# Altium PCB PCB4.PcbDoc
Units mm, origin at the board's own origin, x right, y up, seen from the top; angles counter-clockwise.
Board outline 76.2 x 101.6 mm, 2 copper layers (Top Layer, Bottom Layer); 13 components, 17 nets, 64 pads, 4 vias.
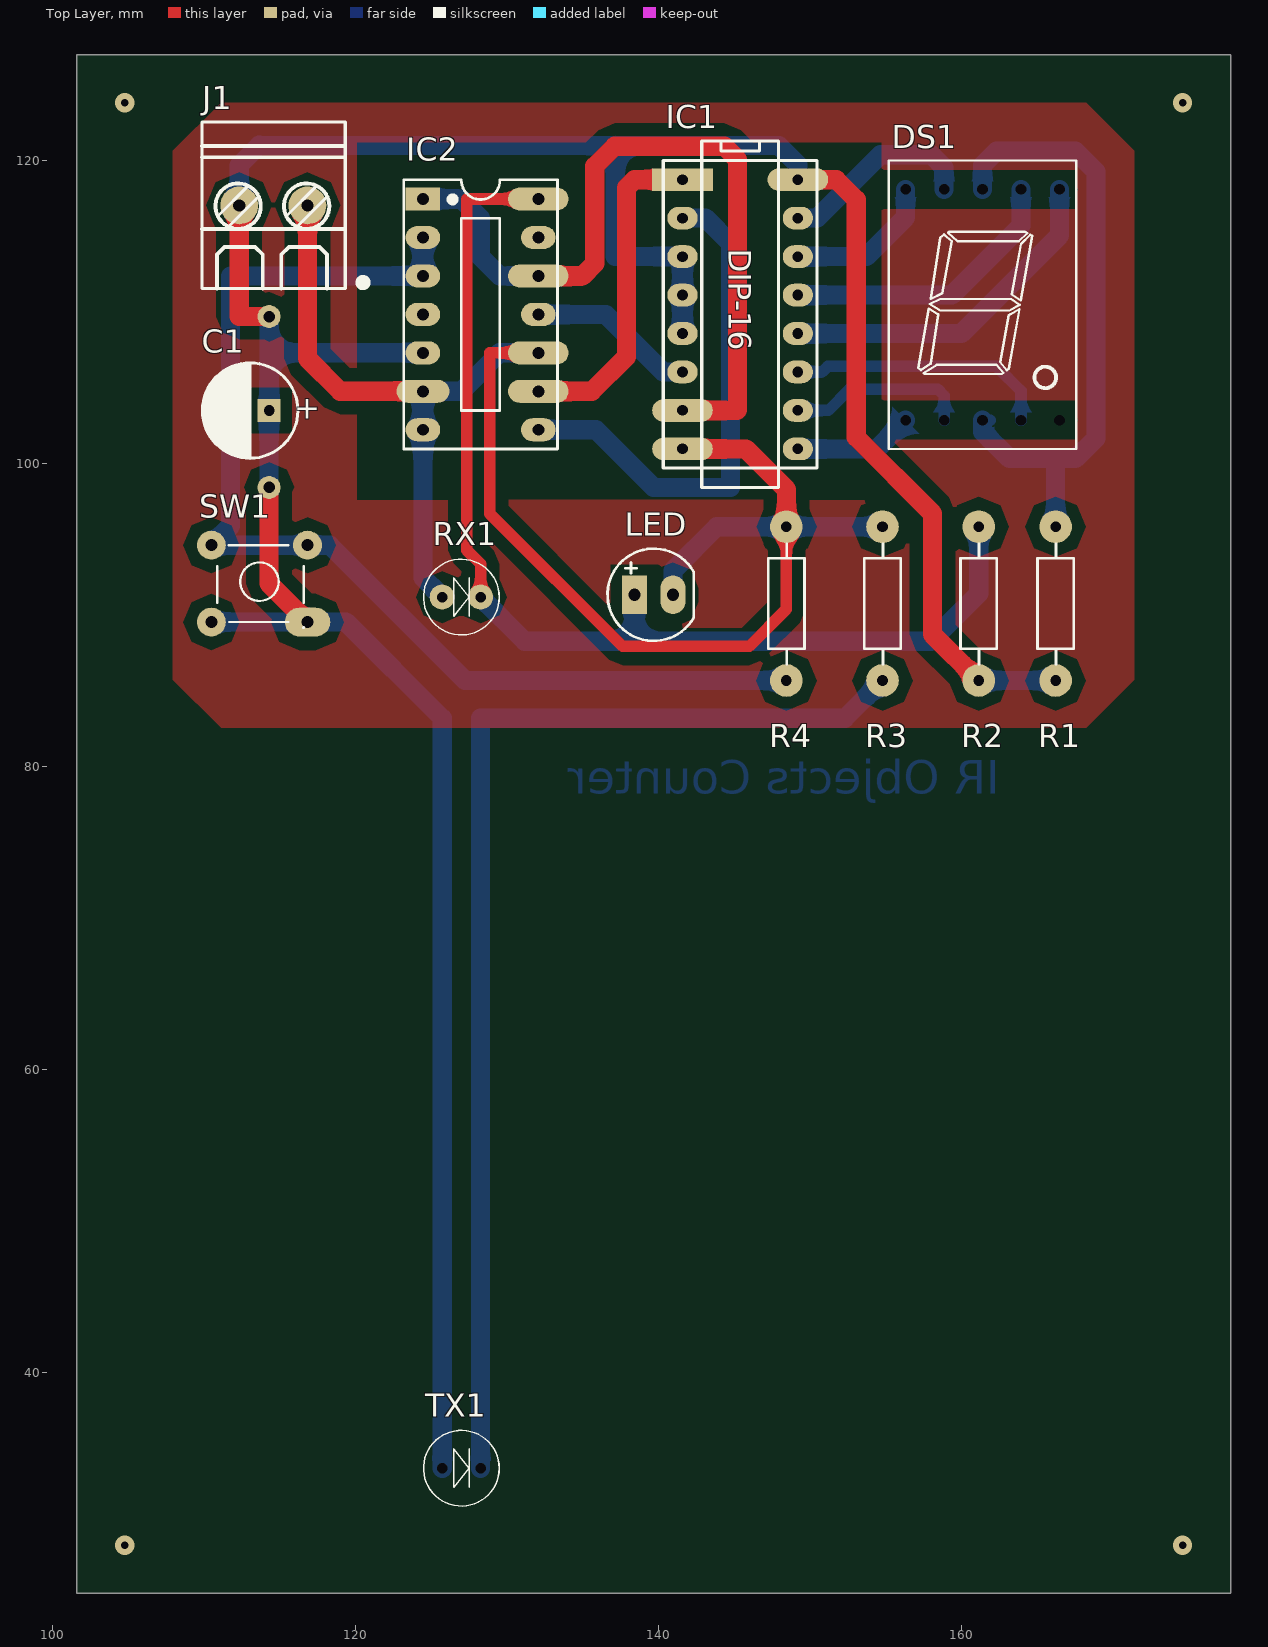
[diagram p0: Top Layer view]
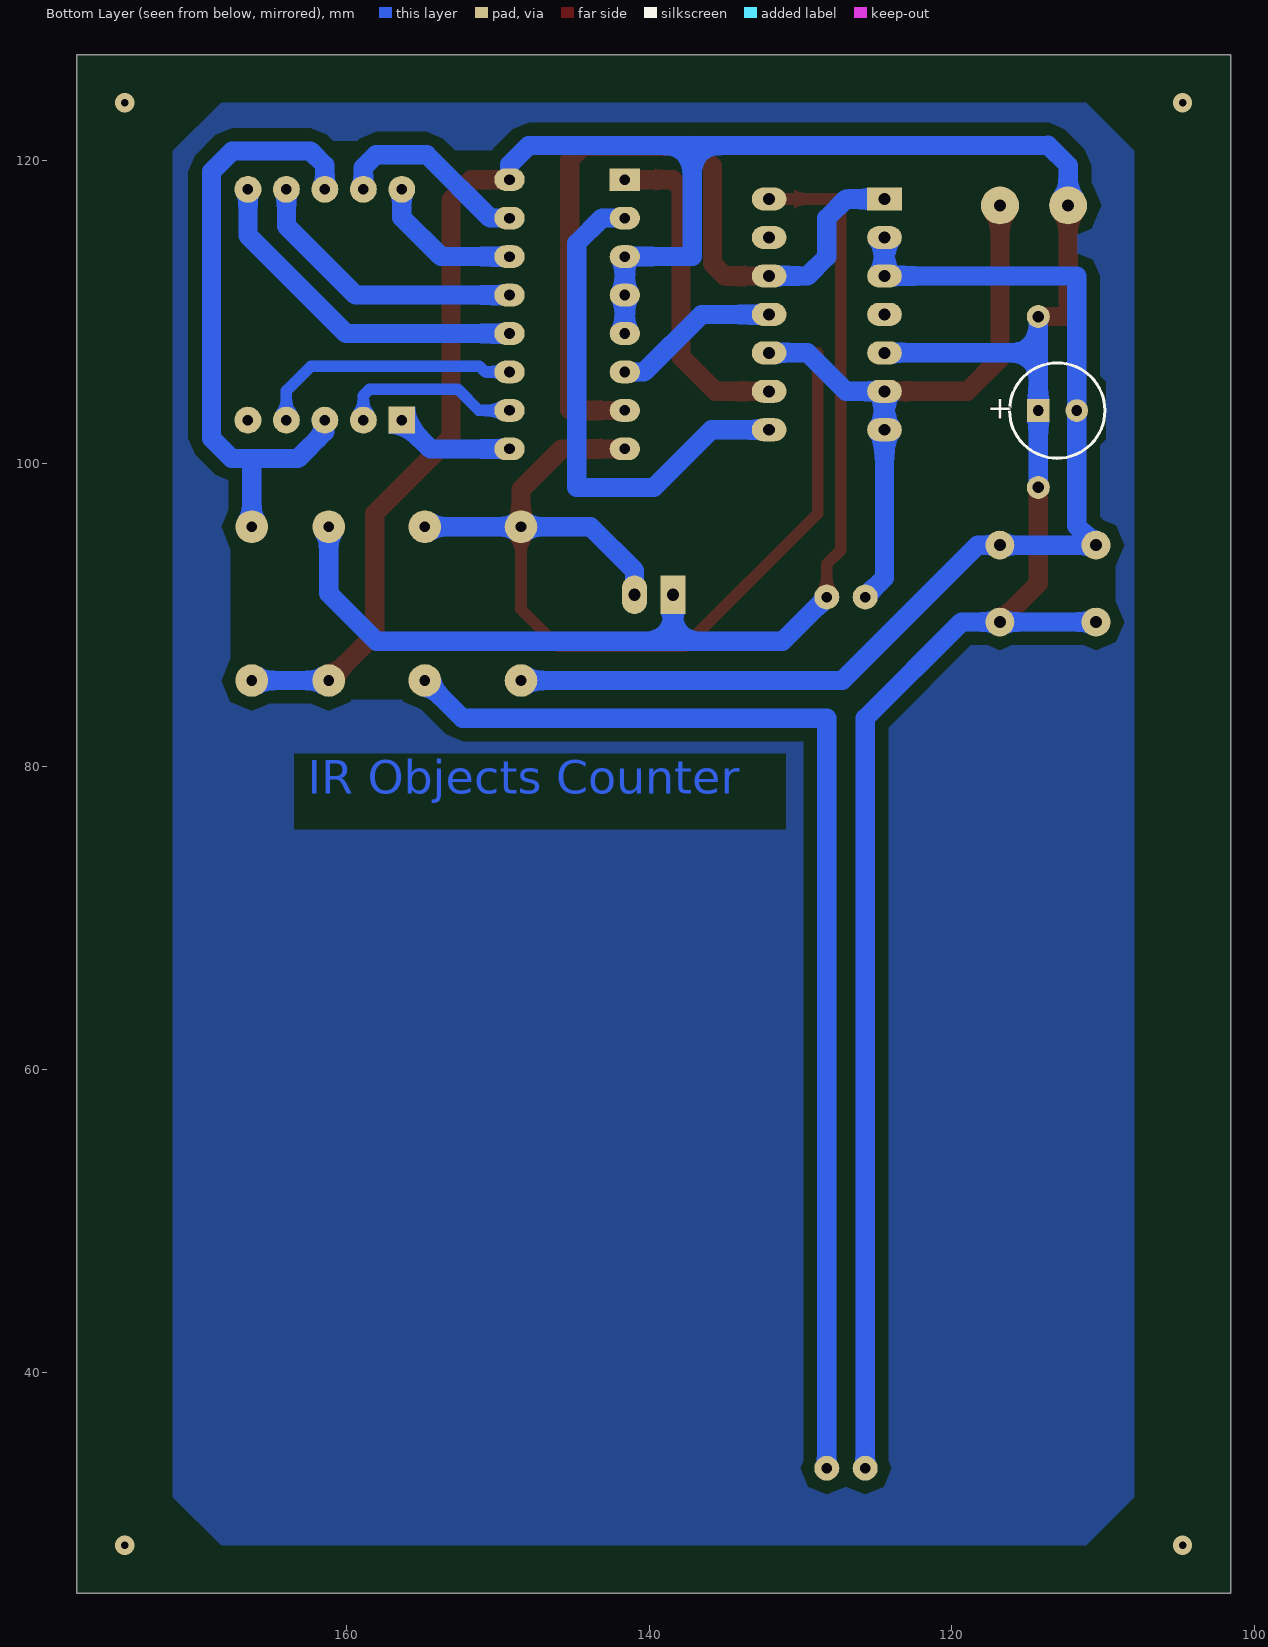
[diagram p1: Bottom Layer view, seen from below]
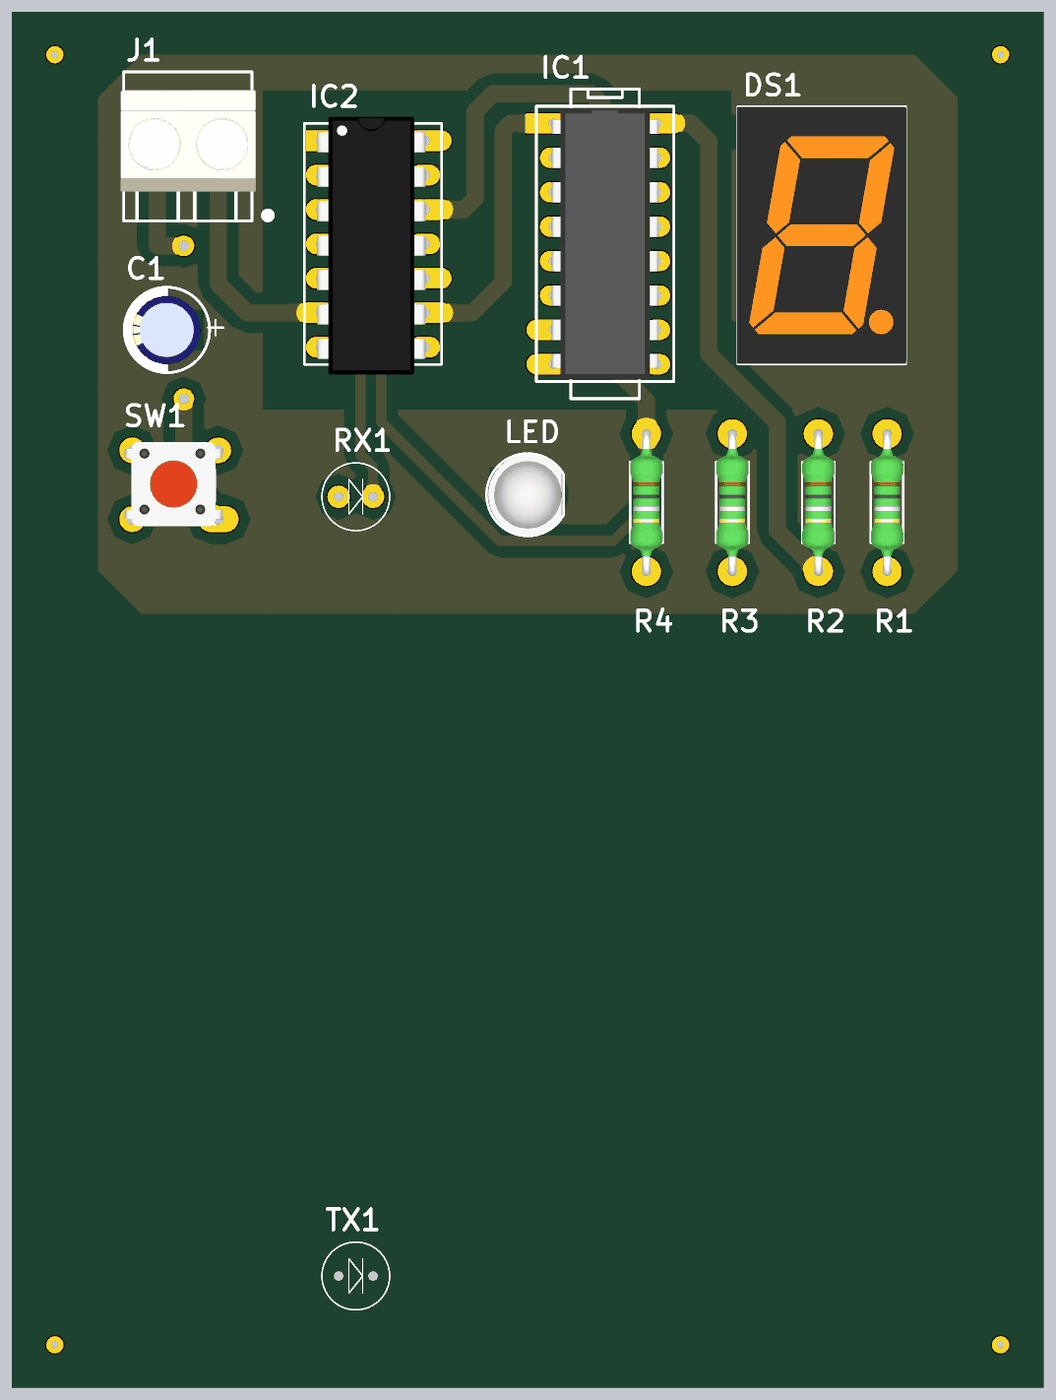
[diagram p2: 3D render of the assembled board from above, using the file's embedded part models]

## Layer stack, top to bottom
Top Solder: solder mask 0.0102, Solder Resist, Dk 3.5
Top Layer: signal copper 0.0356
Dielectric 1: dielectric 0.32, FR-4, Dk 4.8
Bottom Layer: signal copper 0.0356
Bottom Solder: solder mask 0.0102, Solder Resist, Dk 3.5

## Board outline
101.6,25.4 101.6,127 177.8,127 177.8,25.4

## Design rules (kind name [scope] priority, off if disabled: settings)
Clearance [All] p1: gap=0.762
PolygonConnect [All] p1: connectstyle=Relief reliefconductorwidth=0.254 reliefentries=4 polygonreliefangle="90 Angle" airgapwidth=0.254
RoutingVias [All] p1: holewidth=0.711 width=2.032 viastyle="Through Hole" minholewidth=0.711 minwidth=2.032 maxholewidth=0.711 maxwidth=2.032
SolderMaskExpansion [All] p1: expansion=0.102
Width [All] p1: maxlimit=1.27 minlimit=0.508 preferedwidth=1.27
30 further rules are at their usual default settings.

## Components (designator, comment, footprint, x,y, rotation, side; value= is the part's Value field where it differs from the comment)
C1 "Cap Pol" "RADIAL C" 114.3,103.505 r180 top
DS1 "7SEG" LED7SEG-1-0.56 161.29,109.855 r0 top
IC1 "7447" DIP16 145.415,109.855 r270 top
IC2 "7490" DIP14 124.46,117.475 r270 top
J1 "CON.Domino2" "Domino 2M" 109.855,122.555 r270 top
LED "LED" LED-5-RED 138.43,91.338 r0 top
R1 "1KR" RES-1/4W 166.37,91.135 r90 top
R2 "1KR" RES-1/4W 161.29,91.135 r90 top
R3 "100R" RES-1/4W 154.94,91.135 r90 top
R4 "1KR" RES-1/4W 148.59,91.135 r90 top
RX1 "LED" LED-5MM-BLUE 125.73,91.186 r0 top
SW1 "SW" SW2-DIP 110.49,94.615 r0 top
TX1 "LED" LED-5MM-WHITE 125.73,33.655 r0 top

## Footprints (in the part's own frame and the unit in brackets; to place one, negate y for a bottom-side part, rotate by r counter-clockwise, add the part's x,y. Pads: shape width x height; smd on the part's side, far side on the other; paste and mask are expansions set on the pad)
DIP14 [mil] "DIP, 14-Leads, Row Spacing 7.62mm, Pitch 2.54mm, Body 19.2x6.6mm"
  rect 60x90 hole 31: 1(0,0)
  oval 60x90 hole 31: 2(100,0) 3(200,0) 4(300,0) 5(400,0) 7(600,0) 8(600,300) 11(300,300) 13(100,300)
  oval 60x137.8 / inner oval 60x90 / far side oval 60x90 hole 31: 6(500,0)
  oval 60x157.48 / inner oval 60x90 / far side oval 60x90 hole 31: 9(500,300) 10(400,300) 12(200,300) 14(0,300)
  silkscreen extent -50,-50 650,350, body extent -70,-12 680,302, height 145
DIP16 [mm]
  rect 1.5x4 / inner rect 1.5x2 / far side rect 1.5x2 hole 0.7: 1(-8.897,-3.812)
  oval 1.5x2 hole 0.7: 2(-6.357,-3.812) 3(-3.817,-3.812) 4(-1.277,-3.812) 5(1.263,-3.812) 6(3.803,-3.812) 9(8.883,3.808) 10(6.343,3.808) 11(3.803,3.808) 12(1.263,3.808) 13(-1.277,3.808) 14(-3.817,3.808) 15(-6.357,3.808)
  oval 1.5x4 / inner oval 1.5x2 / far side oval 1.5x2 hole 0.7: 7(6.343,-3.812) 8(8.883,-3.812) 16(-8.897,3.808)
  silkscreen extent -11.44,-5.08 11.42,5.08, body extent -10,-3.93 10,3.94, height 1.99
"Domino 2M" [mm]
  round 2.5 hole 0.8: 1(5.5,6.975) 2(5.5,2.475)
  silkscreen extent 0,0 11,10.9, body extent 1.35,-0.22 8.85,9.78, height 10
LED7SEG-1-0.56 [mm]
  rect 0x0 / inner rect 1.778x1.778 / far side rect 1.778x1.778 hole 0.7: 1(-4.953,-6.985)
  round 0 / inner round 1.778 / far side round 1.778 hole 0.7: 2(-2.413,-6.985) 3(0.127,-6.985) 4(2.667,-6.985) 5(5.207,-6.985) 6(5.207,8.255) 7(2.667,8.255) 8(0.127,8.255) 9(-2.413,8.255) 10(-4.953,8.255)
  silkscreen extent -6.07,-8.89 6.32,10.16, body extent -6.12,-8.86 6.38,10.14, height 8
LED-5-RED [mil] "LED 2 PIN, 5 ly , Only colour,pin to pin 100mil"
  rect 65x100 hole 32: 1(0,0)
  oval 65x100 hole 32: 2(100,0)
  silkscreen extent -70,-120 154,120, body extent -65,-119 149,118, height 339
LED-5MM-BLUE [mil]
  round 65 hole 27.56: 1(0,0) 2(100,0)
  silkscreen extent -48,-98 148,98, body extent -54,-105 155,105, height 370
LED-5MM-WHITE [mm]
  round 0 / inner round 1.651 / far side round 1.651 hole 0.7: 1(0,0) 2(2.54,0)
  silkscreen extent -1.23,-2.5 3.77,2.5, body extent -1.38,-2.67 3.94,2.66, height 9.4
"RADIAL C" [mm] "Capacitor, Electrolytic, Radial; Body 6.3 x 6.8 mm (Dia.xH typ); Pin Spacing 2.5 mm (typ)"
  rect 1.5x1.5 hole 0.7: 1(0,0)
  round 1.5 hole 0.7: 2(2.54,0)
  silkscreen extent -1.9,-3.15 4.4,3.15, body extent -1.27,-2.54 3.81,2.54, height 13.7
RES-1/4W [mil]
  round 85 hole 27.56: 1(-215,5) 2(185,5)
  silkscreen extent -173,-42 141,52, body extent -227,-42 197,52, height 95
SW2-DIP [mil] "SW button 4pin, 250 x250 mil"
  round 75 hole 31: 1(0,0) 2(0,-200) 4(250,0)
  oval 118.11x75 / inner round 75 / far side round 75 hole 31: 3(250,-200)
  silkscreen extent 15,-215 240,0, body extent -36,-220 276,24, height 276

## Part data
C1: "Polarized Capacitor"
DS1: library part LED7SEG-1, "14.2 mm General Purpose Blue 7-Segment Display: CC, RH DP, Gray Surface"
IC1: "BCD to 7-Segment Decoder/Driver"
IC2: "4-Bit Decade Counter"
J1: "2 pins Domino Header"
LED RX1 TX1: "LED Single colour Green and Red"
R1 R2 R3 R4: library part Res, "Res"
SW1: library part SW4, "Switch button 4 pin"

## Free pads (board coordinates)
  round 1.524 hole 0.762: 3(114.3,109.713) 5(114.3,98.425)

## Via types
v1: diameter 1.27, hole 0.5, Top Layer to Bottom Layer, 4 vias

## Nets (pads, with @x,y where several pads share a name; then routed paths per layer and width w, separated by ;. In a path a pad name is that pad's centre, name@x,y a point inside that pad or via, vN(x,y) a via of type N, cw(c..) or ccw(c..) an arc to the next point about the centre after c; other vN are vias at no path point)
GND: IC1.8 IC2.6 IC2.7 IC2.10 J1.1 LED.2 R3.2 R4.2 RX1.1 | length 112
  Top Layer w0.762: IC2.10 128.88,107.315 128.88,96.698 137.643,87.935 146.025,87.935 148.463,90.373 R4.2
  Top Layer w1.27: J1.1 116.83,106.944 118.999,104.775 IC2.6 ; IC1.8 145.789,100.972 148.463,98.298 R4.2
  Bottom Layer w1.27: RX1.1 124.46,92.456 IC2.7 IC2.6 127,104.775 129.54,107.315 IC2.10 ; LED.2 140.97,92.939 143.866,95.834 R4.2 R3.2
NetC1_2: C1.2 IC2.2 IC2.3 R4.1 SW1.1 SW1.4 | length 75.2
  Bottom Layer w1.27: IC2.2 IC2.3 111.76,112.395 C1.2 111.76,95.885 SW1.1 SW1.4 118.313,94.615 127.254,85.674 R4.1
NetDS1_1: DS1.1 IC1.9 | length 7.9
  Bottom Layer w1.27: IC1.9 154.439,100.972 DS1.1
NetDS1_2: DS1.2 IC1.10 | length 12
  Bottom Layer w0.762: IC1.10 151.239,103.512 152.629,104.902 158.471,104.902 158.877,104.496 DS1.2
NetDS1_3: DS1.3 DS1.8 R1.2 | length 42.3
  Bottom Layer w0.762: DS1.3 DS1.3@161.925,102.87 ; 166.243,100.203 166.37,100.33
  Bottom Layer w1.27: DS1.3 161.417,102.108 163.195,100.33 166.37,100.33 167.564,100.33 168.91,101.676 168.91,119.278 167.538,120.65 162.357,120.65 161.417,119.71 DS1.8 ; R1.2 166.243,100.203
NetDS1_4: DS1.4 IC1.11 | length 17.5
  Bottom Layer w0.762: IC1.11 150.833,106.052 151.206,106.426 162.331,106.426 163.957,104.8 DS1.4
NetDS1_6: DS1.6 IC1.12 | length 23
  Bottom Layer w1.27: IC1.12 160.027,108.592 166.497,115.062 DS1.6
NetDS1_7: DS1.7 IC1.13 | length 19
  Bottom Layer w1.27: IC1.13 159.392,111.132 163.957,115.697 DS1.7
NetDS1_9: DS1.9 IC1.15 | length 13.2
  Bottom Layer w1.27: IC1.15 150.502,116.212 154.686,120.396 158.039,120.396 158.877,119.558 DS1.9
NetDS1_10: DS1.10 IC1.14 | length 10
  Bottom Layer w1.27: IC1.14 153.754,113.672 156.337,116.256 DS1.10
NetIC1_1: IC1.1 IC2.9 | length 21.8
  Top Layer w1.27: IC2.9 135.611,104.775 137.897,107.061 137.897,118.212 138.437,118.752 IC1.1
NetIC1_2: IC1.2 IC2.8 | length 34.3
  Bottom Layer w1.27: IC2.8 135.89,102.235 139.7,98.425 144.78,98.425 144.78,114.554 143.122,116.212 IC1.2
NetIC1_6: IC1.6 IC2.11 | length 11.1
  Bottom Layer w1.27: IC2.11 136.532,109.855 140.335,106.052 IC1.6
NetIC1_7: IC1.7 IC2.1 IC2.12 | length 52.2
  Top Layer w0.762: 145.194,103.512 145.237,103.556
  Top Layer w1.27: IC2.12 135.001,112.395 135.814,113.208 135.814,119.634 137.135,120.955 144.374,120.955 145.237,120.091 145.237,103.556 ; IC1.7 145.194,103.512
  Bottom Layer w1.27: IC2.1 127,117.475 128.27,116.205 128.27,113.665 129.54,112.395 IC2.12
NetIC2_14: IC2.14 LED.1 R2.2 RX1.2 | length 74.3
  Top Layer w0.762: RX1.2 128.27,93.37 127.356,94.285 127.356,117.475 IC2.14
  Bottom Layer w1.27: RX1.2 131.191,88.265 138.43,88.265 ; LED.1 138.43,88.265 ; R2.2 161.163,91.415 158.013,88.265 138.43,88.265
NetR3_1: R3.1 TX1.2 | length 77.1
  Bottom Layer w1.27: TX1.2 128.27,83.185 152.324,83.185 R3.1
VCC: C1.1 IC1.3 IC1.4 IC1.5 IC1.16 IC2.5 J1.2 pad.3 pad.5 R1.1 R2.1 SW1.2 SW1.3 TX1.1 | length 219.1
  Top Layer w1.27: J1.2 112.33,109.713 pad.3 ; pad.5 114.3,92.075 SW1.3 ; IC1.16 151.758,118.752 153.078,117.432 153.078,101.734 158.115,96.698 158.115,88.722 R2.1
  Bottom Layer w0.762: 112.33,119.696 112.33,119.685 113.651,121.006 ; 134.899,121.006 137.16,121.006 ; IC1.16 IC1.16@149.225,118.752
  Bottom Layer w1.27: SW1.2 SW1.3 119.38,89.535 125.73,83.185 TX1.1 ; J1.2 112.33,119.685 ; 112.33,119.696 113.652,121.018 ; 113.651,121.006 134.899,121.006 147.955,121.006 149.225,119.736 IC1.16@149.225,118.752 ; pad.5 C1.1 ; pad.3 C1.1 ; IC2.5 114.3,107.315 C1.1 ; 137.16,121.006 137.16,113.672 IC1.3 IC1.4 IC1.5 ; R2.1 R1.1
pads on no net: DS1.5 IC2.4 IC2.13
copper on no net:
  other v1: 104.775,28.575 174.625,28.575 104.775,123.825 174.625,123.825

## Polygon pours and split planes (outlines as drawn)
no net on Bottom Layer "Mechanical 1-No Net" (solid, pour order 18): 107.95,120.65 111.125,123.825 168.275,123.825 171.45,120.65 171.45,31.75 168.275,28.575 111.125,28.575 107.95,31.75 107.95,120.65
no net on Top Layer "Mechanical 1-No Net" (solid, pour order 6): 107.95,120.65 111.125,123.825 168.275,123.825 171.45,120.65 171.45,85.725 168.275,82.55 111.125,82.55 107.95,85.725 107.95,120.65

## Other copper
Top Layer:
  pour cut-out: 154.737,121.183 154.737,97.612 120.117,97.612 120.117,121.183
  pour cut-out: 154.94,119.38 167.64,119.38 167.64,116.84 154.94,116.84
  pour cut-out: 154.94,104.14 167.64,104.14 167.64,101.6 154.94,101.6
Bottom Layer:
  pour cut-out: 111.76,120.015 113.665,121.92 148.59,121.92 149.86,120.65 153.67,120.65 154.305,121.285 168.275,121.285 169.545,120.015 169.545,101.6 167.64,99.695 167.64,84.455 154.94,84.455 153.035,82.55 125.095,82.55 118.745,88.9 109.22,88.9 109.22,95.25 110.49,96.52 110.49,100.965 109.855,101.6 109.855,105.41 110.49,106.045 110.49,112.395 111.76,113.665
  text "IR Objects Counter" at 162.56,77.47 h3.81

## Text inside footprints (layer, text, board x,y; h text height)
C1: Top Overlay "+" at 117.675,104.255 h1.5 r180; Bottom Overlay "+" at 117.675,104.255 h1.5 r180
IC1: Top Overlay "DIP-16" at 144.651,114.18 h1.5 r270